# Altium PCB NEW_PCB_2023-11-04.pcbdoc
Units mil, origin at the board's own origin, x right, y up, seen from the top; angles counter-clockwise.
Board outline 1530 x 1287.8 mil, 2 copper layers (Top Layer, Bottom Layer); 1 components, 0 nets, 17 pads, 0 vias.
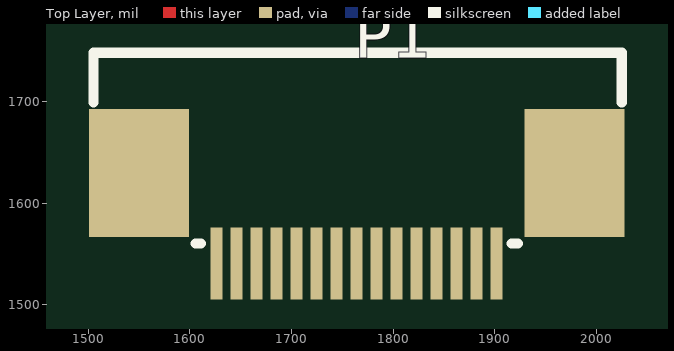
[diagram p0: Top Layer view]
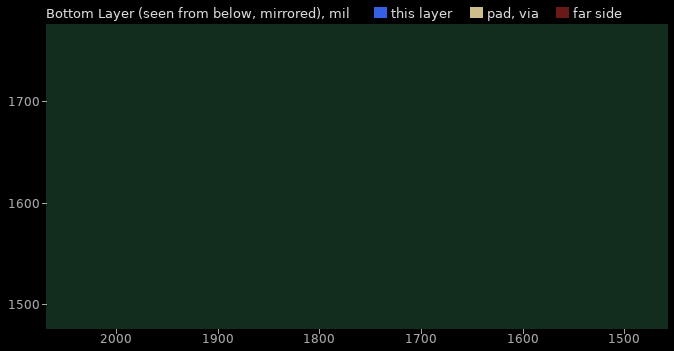
[diagram p1: Bottom Layer view, seen from below]

## Layer stack, top to bottom
Top Layer: signal copper (thickness not stored)
Dielectric: dielectric 12.6, FR-4, Dk 4.8
Bottom Layer: signal copper (thickness not stored)

## Board outline
2530,1000 1000,1000 1000,2287.8 2530,2287.8

## Components (designator, comment, footprint, x,y, rotation, side; value= is the part's Value field where it differs from the comment)
P1 "FPC-SMD_P0.50-15P_LSXJ-H2.0-15P" FPC-SMD_P0.50-15P_LSXJ-H2.0-15P 1764,1584.91 r0 top

## Footprints (in the part's own frame and the unit in brackets; to place one, negate y for a bottom-side part, rotate by r counter-clockwise, add the part's x,y. Pads: shape width x height; smd on the part's side, far side on the other; paste and mask are expansions set on the pad)
FPC-SMD_P0.50-15P_LSXJ-H2.0-15P [mm]
  rect 0.3x1.8 smd paste+0 mask+0.051: 1(-3.508,-1.13) 2(-3.008,-1.13) 3(-2.508,-1.13) 4(-2.008,-1.13) 5(-1.508,-1.13) 6(-1.008,-1.13) 7(-0.508,-1.13) 8(-0.008,-1.13) 9(0.492,-1.13) 10(0.992,-1.13) 11(1.492,-1.13) 12(1.992,-1.13) 13(2.492,-1.13) 14(2.992,-1.13) 15(3.492,-1.13)
  rect 2.5x3.2 smd paste+0 mask+0.051: 16(5.445,1.13) 17(-5.445,1.13)
  silkscreen extent -6.58,-0.63 6.63,4.14

## Nets (pads, with @x,y where several pads share a name; then routed paths per layer and width w, separated by ;. In a path a pad name is that pad's centre, name@x,y a point inside that pad or via, vN(x,y) a via of type N, cw(c..) or ccw(c..) an arc to the next point about the centre after c; other vN are vias at no path point)
pads on no net: P1.1 P1.2 P1.3 P1.4 P1.5 P1.6 P1.7 P1.8 P1.9 P1.10 P1.11 P1.12 P1.13 P1.14 P1.15 P1.16 P1.17